# EAGLE board can-weichendecoder-magnet (EAGLE 7.5.0)
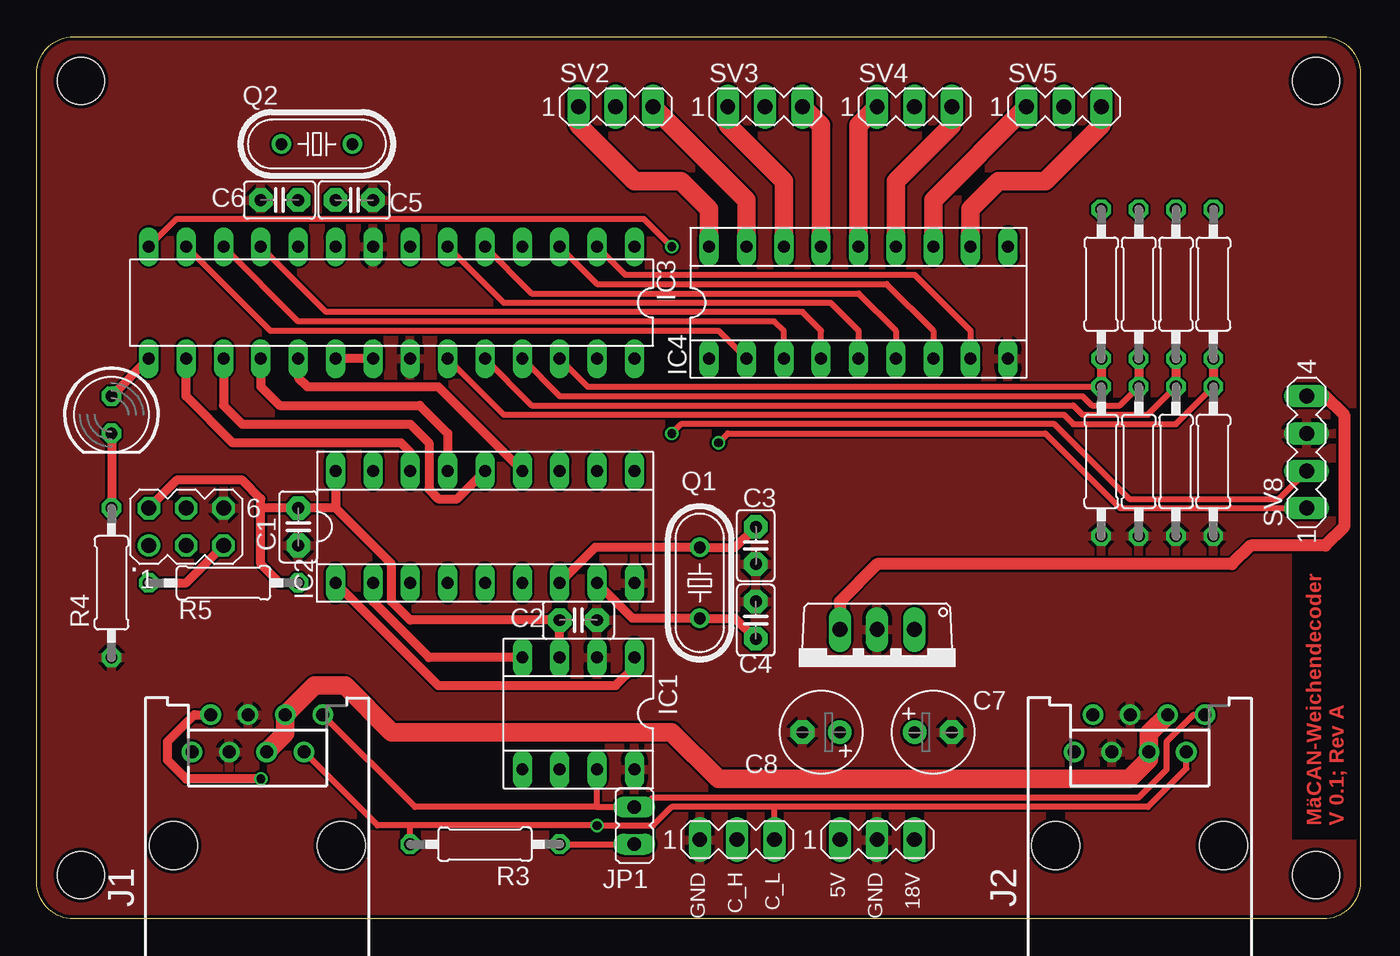
[diagram p0: board, top side]
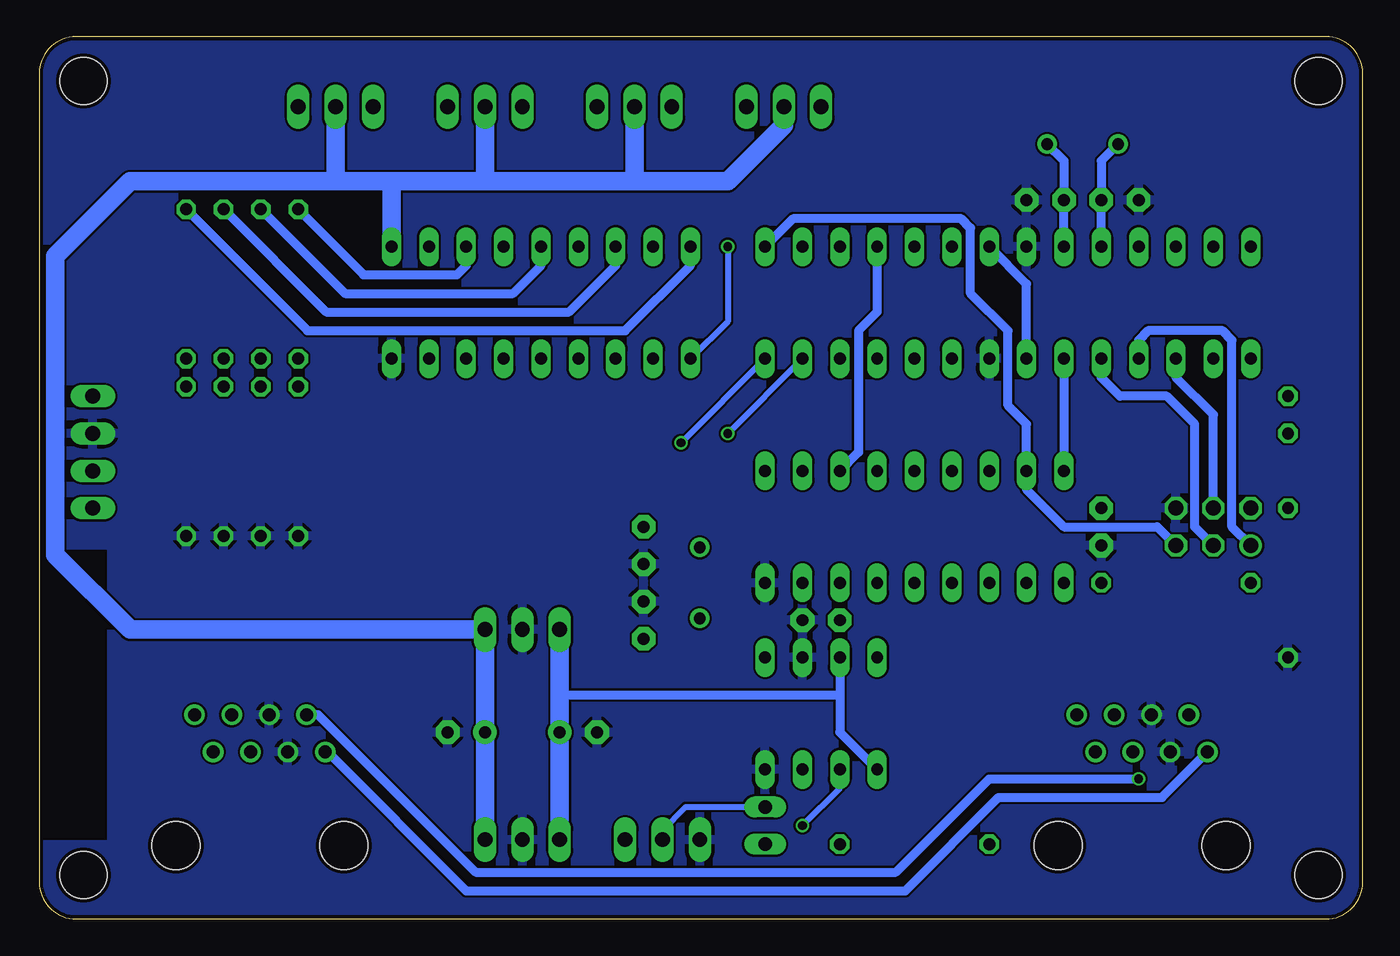
[diagram p1: board, bottom side, seen from below]

Size 90 x 60 mm. Coordinates in mm from the lower left corner, seen from the top.
Outline: 0,57.5 arc-90 2.5,60 87.5,60 arc-90 90,57.5 90,2.5 arc-90 87.5,0 2.5,0 arc-90 0,2.5 0,57.5
Copper layers (1*16): Top 0.035mm / dielectric 1.5mm / Bottom 0.035mm
Design rules "ITEADstudioDRC": minimum track width 6mil, minimum drill 12mil, track to track 6mil, track to pad 6mil, pad to pad 6mil, via to via 6mil, smd to smd 0mil, copper to edge 10mil, drill to drill 10mil, minimum pad ring 10mil, minimum via ring 6mil, stop-mask expansion 2mil, vias tented up to drill 100mil, thermal gap 10mil
Holes 3.2 mm at 3,3 87,3 87,57 3,57

## Footprints (pad centres in the part's own frame; a part is rotated, then mirrored left to right if it is on the bottom)
C2.5-2 = drill 0.813 pad 1.6 octagon: 1 -1.27,0; 2 1.27,0
E2,5-6 = drill 0.813 pad 1.6: + -1.27,0 | drill 0.813 pad 1.6 octagon: - 1.27,0
SOCKET-08 = drill 0.813 long: 1 -3.81,-3.81; 2 -1.27,-3.81; 3 1.27,-3.81; 4 3.81,-3.81; 5 3.81,3.81; 6 1.27,3.81; 7 -1.27,3.81; 8 -3.81,3.81
SOCKET-18 = drill 0.813 long: 1 -10.16,-3.81; 2 -7.62,-3.81; 3 -5.08,-3.81; 4 -2.54,-3.81; 5 0,-3.81; 6 2.54,-3.81; 7 5.08,-3.81; 8 7.62,-3.81; 9 10.16,-3.81; 10 10.16,3.81; 11 7.62,3.81; 12 5.08,3.81; 13 2.54,3.81; 14 0,3.81; 15 -2.54,3.81; 16 -5.08,3.81; 17 -7.62,3.81; 18 -10.16,3.81
DIL28-3 = drill 0.813 long: 1 -16.51,-3.81; 2 -13.97,-3.81; 3 -11.43,-3.81; 4 -8.89,-3.81; 5 -6.35,-3.81; 6 -3.81,-3.81; 7 -1.27,-3.81; 8 1.27,-3.81; 9 3.81,-3.81; 10 6.35,-3.81; 11 8.89,-3.81; 12 11.43,-3.81; 13 13.97,-3.81; 14 16.51,-3.81; 15 16.51,3.81; 16 13.97,3.81; 17 11.43,3.81; 18 8.89,3.81; 19 6.35,3.81; 20 3.81,3.81; 21 1.27,3.81; 22 -1.27,3.81; 23 -3.81,3.81; 24 -6.35,3.81; 25 -8.89,3.81; 26 -11.43,3.81; 27 -13.97,3.81; 28 -16.51,3.81
TO220V = drill 1.016 long: 1 -2.54,-2.54; 2 0,-2.54; 3 2.54,-2.54
215877-7 = drill 0.889: 1 -4.445,6.35; 2 -3.175,8.89; 3 -1.905,6.35; 4 -0.635,8.89; 5 0.635,6.35; 6 1.905,8.89; 7 3.175,6.35; 8 4.445,8.89 | hole 3.251: -5.715,0; 5.715,0
JP1 = drill 0.914 long: 1 0,-1.27; 2 0,1.27
LED5MM = drill 0.813 octagon: A -1.27,0; K 1.27,0
HC49/S = drill 0.813: 1 -2.413,0; 2 2.413,0
0207/10 = drill 0.813 octagon: 1 -5.08,0; 2 5.08,0
MA03-2 = drill 1.016: 1 -2.54,-1.27 | drill 1.016 octagon: 2 -2.54,1.27; 3 0,-1.27; 4 0,1.27; 5 2.54,-1.27; 6 2.54,1.27
MA03-1 = drill 1.016 long: 1 -2.54,0; 2 0,0; 3 2.54,0
MA04-1 = drill 1.016 long: 1 -3.81,0; 2 -1.27,0; 3 1.27,0; 4 3.81,0

## Placement (x,y rotation side)
C1  100n  [C2.5-2]  17.78,26.67 90 top
C2  100n  [C2.5-2]  36.83,20.32 0 top
C3  22p  [C2.5-2]  48.9,25.4 90 top
C4  22p  [C2.5-2]  48.9,20.32 270 top
C5  22p  [C2.5-2]  21.59,48.9 180 top
C6  22p  [C2.5-2]  16.51,48.9 0 top
C7  0,1µ  [E2,5-6]  60.96,12.7 0 top
C8  0,1µ  [E2,5-6]  53.34,12.7 180 top
IC1  MCP 2562  [SOCKET-08]  36.83,13.97 180 top
IC2  MCP 2515  [SOCKET-18]  30.48,26.67 0 top
IC3  ATMEGA 328P  [DIL28-3]  24.13,41.91 180 top
IC4  ULN 2803A  [SOCKET-18]  55.88,41.91 0 top
IC5  7805TV  [TO220V]  57.15,17.14 180 top
J1  [215877-7]  15,5 0 top
J2  [215877-7]  75,5 0 top
JP1  CAN-termination  [JP1]  40.64,6.35 0 top
LED3  [LED5MM]  5.08,34.29 270 top
Q1  16M  [HC49/S]  45.09,22.86 90 top
Q2  16M  [HC49/S]  19.05,52.7 0 top
R3  120  [0207/10]  30.48,5.08 180 top
R4  330  [0207/10]  5.08,22.86 90 top
R5  10K  [0207/10]  12.7,22.86 0 top
R6  10K  [0207/10]  72.39,43.18 270 top
R7  10K  [0207/10]  74.93,43.18 270 top
R8  10K  [0207/10]  77.47,43.18 270 top
R9  10K  [0207/10]  80.01,43.18 270 top
R10  2K  [0207/10]  72.39,31.11 270 top
R11  2K  [0207/10]  74.93,31.11 270 top
R12  2K  [0207/10]  77.47,31.11 270 top
R13  2K  [0207/10]  80.01,31.11 270 top
SV1  ICSP  [MA03-2]  10.16,26.67 0 top
SV2  [MA03-1]  39.37,55.24 0 top
SV3  [MA03-1]  49.53,55.24 0 top
SV4  [MA03-1]  59.69,55.24 0 top
SV5  [MA03-1]  69.85,55.24 0 top
SV6  18V IN  [MA03-1]  57.15,5.4 0 top
SV7  CAN  [MA03-1]  47.62,5.4 0 top
SV8  [MA04-1]  86.36,31.75 90 top

## Library data of the parts
C1-C6 = capacitor-wima
C7 C8 R3-R13 = rcl
IC1-IC4 = ic-package
IC5 = linear
J1 J2 = con-amp
JP1 = jumper
LED3 = led
Q1 Q2 = crystal; OC_FARNELL: 1667008; OC_NEWARK: unknown
SV1-SV8 = con-lstb; OC_FARNELL: unknown; OC_NEWARK: unknown

## Nets
18V: C7.+ IC4.10 IC5.1 SV2.2 SV3.2 SV4.2 SV5.2 SV6.3
CAN-H: IC1.7 J1.8 J2.8 JP1.2 SV7.2
CAN-L: IC1.6 J1.7 J2.7 R3.2 SV7.3
CS: IC2.16 IC3.16
GND: C1.1 C2.2 C3.1 C4.1 C5.1 C6.1 C7.- C8.- IC1.2 IC1.8 IC2.9 IC3.8 IC3.22 IC4.9 IC5.2 J1.3 J1.4 J2.3 J2.4 R4.1 R10.2 R11.2 R12.2 R13.2 SV1.6 SV6.2 SV7.1 SV8.3
INT: IC2.12 IC3.4
MISO: IC2.15 IC3.18 SV1.1
MOSI: IC2.14 IC3.17 SV1.4
N$1: J1.5 J1.6 J2.5 J2.6
N$2: IC1.4 IC2.2
N$3: J1.2 J2.2
N$4: C4.2 IC2.8 Q1.1
N$5: JP1.1 R3.1
N$6: C3.2 IC2.7 Q1.2
N$7: C5.2 IC3.9 Q2.2
N$8: C6.2 IC3.10 Q2.1
N$9: IC1.1 IC2.1
N$10: IC3.2 IC4.8
N$11: IC3.3 IC4.7
N$12: LED3.K R4.2
N$13: IC3.15 LED3.A
N$14: IC3.5 IC4.6
N$15: IC3.6 IC4.5
N$16: IC3.11 IC4.4
N$17: IC3.12 IC4.3
N$18: IC3.13 IC4.2
N$19: IC3.14 IC4.1
N$20: IC4.18 R9.1 SV2.1
N$21: IC4.17 SV2.3
N$22: IC4.16 R8.1 SV3.1
N$23: IC4.15 SV3.3
N$24: IC4.14 R7.1 SV4.1
N$25: IC4.13 SV4.3
N$26: IC4.12 R6.1 SV5.1
N$27: IC4.11 SV5.3
N$28: IC3.26 R6.2 R10.1
N$29: IC3.25 R7.2 R11.1
N$30: IC3.24 R8.2 R12.1
N$31: IC3.23 R9.2 R13.1
N$32: J1.1 J2.1
N$33: IC3.28 SV8.1
N$34: IC3.27 SV8.2
RESET: IC2.17 IC3.1 R5.1 SV1.5
SCK: IC2.13 IC3.19 SV1.3
VCC: C1.2 C2.1 C8.+ IC1.3 IC1.5 IC2.18 IC3.7 IC3.20 IC3.21 IC5.3 R5.2 SV1.2 SV6.1 SV8.4

## Tracks (layer width: path | path; a pad name or v marks a point on that pad's centre or on a via)
18V
  Bottom 1.27: 69.85,50.16 83.82,50.16 88.9,45.09 88.9,24.77 83.82,19.68 IC5.1 C7.+ SV6.3 | 69.85,50.16 66.04,50.16 | 66.04,50.16 59.69,50.16 | 59.69,50.16 49.53,50.16 | 49.53,50.16 43.18,50.16 39.37,53.98 SV2.2 | SV3.2 49.53,50.16 | SV4.2 59.69,50.16 | SV5.2 69.85,50.16 | IC4.10 66.04,50.16
CAN-H
  Top 0.406: 38.1,7.62 IC1.7 | 38.1,7.62 JP1.2 41.27,7.62 41.91,8.26 74.93,8.26 76.83,10.16 76.83,12.06 78.66,13.89 J2.8 | 38.1,7.62 25.71,7.62 J1.8
  Bottom 0.406: SV7.2 47.62,6.03 46.04,7.62 JP1.2
CAN-L  (via drill 0.6)
  Top 0.406: 50.16,7.62 75.56,7.62 78.17,10.23 J2.7 | 50.16,7.62 43.18,7.62 41.91,6.35 v38.1,6.35 25.4,6.35 | SV7.3 50.16,7.62 | 25.4,6.35 23.18,6.35 J1.7 | R3.2 25.4,6.35
  Bottom 0.406: IC1.6 35.56,8.89 v38.1,6.35
CS
  Top 0.61: IC2.16 25.4,31.75 24.77,32.38 13.34,32.38 10.16,35.56 IC3.16
GND
  pour Top: -1.27,-1.27 91.44,-1.27 91.44,5.08 85.09,5.08 85.09,25.4 91.44,25.4 91.44,60.96 -1.27,60.96
  pour Bottom: -1.27,-1.27 91.44,-1.27 91.44,5.08 85.09,5.08 85.09,25.4 91.44,25.4 91.44,60.96 -1.27,60.96
INT
  Bottom 0.61: IC3.4 33.02,41.27 34.29,40.01 34.29,31.75 IC2.12
MISO
  Top 0.61: IC3.18 15.24,36.2 16.51,34.92 26.04,34.92 27.94,33.02 IC2.15
  Bottom 0.61: SV1.1 8.89,26.67 8.89,39.37 9.53,40.01 14.61,40.01 15.24,39.37 IC3.18
MOSI
  Top 0.61: IC3.17 12.7,34.92 13.97,33.66 25.4,33.66 26.67,32.38 26.67,29.21 27.3,28.57 28.57,28.57 IC2.14
  Bottom 0.61: SV1.4 10.16,34.29 12.7,36.83 IC3.17
N$1
  Top 1.27: J1.5 16.91,12.62 J1.6 18.89,15.88 20.95,15.88 24.13,12.7 43.18,12.7 46.35,9.53 74.3,9.53 75.64,10.87 J2.5 75.64,12.62 J2.6
N$2
  Top 0.61: IC1.4 26.67,17.78 22.86,21.59 IC2.2
N$3  (via drill 0.6)
  Top 0.61: v15.24,9.53 10.16,9.53 8.89,10.79 8.89,12.06 10.71,13.89 J1.2
  Bottom 0.61: v15.24,9.53 25.4,9.53 31.75,3.17 60.33,3.17 71.04,13.89 J2.2
N$4
  Top 0.61: IC2.8 40.51,20.45 Q1.1 47.5,20.45 C4.2
N$5
  Top 0.406: R3.1 JP1.1
N$6
  Top 0.61: IC2.7 37.97,25.27 Q1.2 47.5,25.27 C3.2
N$7
  Bottom 0.61: IC3.9 C5.2 20.32,51.56 Q2.2
N$8
  Bottom 0.61: IC3.10 C6.2 17.78,51.56 Q2.1
N$9
  Top 0.61: IC2.1 27.3,15.88 39.37,15.88 40.64,17.14 IC1.1
N$10
  Top 0.406: IC3.2 40.01,43.81 59.69,43.81 63.5,40.01 IC4.8
N$11
  Top 0.406: IC3.3 38.1,43.18 57.78,43.18 60.96,40.01 IC4.7
N$12
  Top 0.61: LED3.K R4.2
N$13
  Top 0.61: IC3.15 LED3.A
N$14
  Top 0.406: IC3.5 33.66,42.55 55.88,42.55 58.42,40.01 IC4.6
N$15
  Top 0.406: IC3.6 31.75,41.91 53.98,41.91 55.88,40.01 IC4.5
N$16
  Top 0.406: IC4.4 53.34,40.01 52.07,41.27 19.68,41.27 IC3.11
N$17
  Top 0.406: IC4.3 50.8,40.01 50.16,40.64 17.78,40.64 IC3.12
N$18
  Top 0.406: IC3.13 15.88,40.01 46.35,40.01 IC4.2
N$19  (via drill 0.6)
  Top 0.406: IC3.14 9.53,47.62 41.27,47.62 v43.18,45.72
  Bottom 0.406: v43.18,45.72 43.18,40.64 IC4.1
N$20
  Top 1.27: IC4.18 45.72,48.26 43.81,50.16 40.64,50.16 36.83,53.98 SV2.1
  Bottom 0.61: R9.1 71.75,40.01 50.16,40.01 45.72,44.45 IC4.18
N$21
  Top 1.27: IC4.17 48.26,48.9 SV2.3
N$22
  Top 1.27: IC4.16 50.8,50.16 46.99,53.98 SV3.1
  Bottom 0.61: R8.1 70.48,41.27 53.98,41.27 50.8,44.45 IC4.16
N$23
  Top 1.27: IC4.15 53.34,53.98 SV3.3
N$24
  Top 1.27: IC4.14 55.88,53.98 SV4.1
  Bottom 0.61: R7.1 69.22,42.55 57.78,42.55 55.88,44.45 IC4.14
N$25
  Top 1.27: IC4.13 58.42,50.16 62.23,53.98 SV4.3
N$26
  Top 1.27: IC4.12 60.96,48.9 SV5.1
  Bottom 0.61: R6.1 67.94,43.81 61.59,43.81 60.96,44.45 IC4.12
N$27
  Top 1.27: IC4.11 63.5,48.26 65.41,50.16 68.58,50.16 72.39,53.98 SV5.3
N$28
  Top 0.406: R10.1 37.47,36.2 IC3.26
  Top 0.61: R6.2 R10.1
N$29
  Top 0.406: R11.1 73.66,34.92 71.75,34.92 71.12,35.56 35.56,35.56 IC3.25
  Top 0.61: R7.2 R11.1
N$30
  Top 0.406: IC3.24 33.66,34.92 70.48,34.92 71.12,34.29 75.56,34.29 R12.1
  Top 0.61: R8.2 R12.1
N$31
  Top 0.406: IC3.23 31.75,34.29 69.85,34.29 70.48,33.66 77.47,33.66 R13.1
  Top 0.61: R9.2 R13.1
N$32
  Bottom 0.61: J1.1 13.65,8.26 24.77,8.26 31.11,1.91 60.96,1.91 70.41,11.35 J2.1
N$33  (via drill 0.6)
  Top 0.406: v46.35,32.38 46.99,33.02 68.58,33.02 73.66,27.94 SV8.1
  Bottom 0.406: IC3.28 v46.35,32.38
N$34  (via drill 0.6)
  Top 0.406: v43.18,33.02 43.81,33.66 69.22,33.66 74.3,28.57 84.45,28.57 SV8.2
  Bottom 0.406: v43.18,33.02 IC3.27
RESET
  Top 0.61: R5.1 10.16,22.86 SV1.5
  Bottom 0.61: SV1.5 13.97,26.67 20.32,26.67 22.86,29.21 IC2.17 22.86,33.66 24.13,34.92 24.13,40.01 26.67,42.55 26.67,46.99 27.3,47.62 38.73,47.62 IC3.1
SCK
  Top 0.61: IC3.19 17.78,36.83 18.41,36.2 27.3,36.2 IC2.13
  Bottom 0.61: SV1.3 11.43,26.67 11.43,33.66 13.34,35.56 16.51,35.56 17.78,36.83 IC3.19
VCC
  Top 0.61: IC1.3 C2.1 25.4,20.32 24.13,21.59 24.13,24.13 20.32,27.94 | 20.32,27.94 C1.2 15.24,27.94 | IC2.18 20.32,27.94 | IC3.20 IC3.21 22.86,37.47 | R5.2 16.51,22.86 15.24,24.13 15.24,27.94 | 15.24,27.94 15.24,28.57 13.97,29.84 9.53,29.84 SV1.2
  Top 0.813: SV8.4 87.63,35.56 88.9,34.29 88.9,26.67 87.63,25.4 82.55,25.4 81.28,24.13 57.15,24.13 54.61,21.59 IC5.3
  Bottom 0.61: IC1.3 35.56,15.24 | 35.56,15.24 35.56,12.7 IC1.5 | IC3.20 IC2.18 | IC3.21 22.86,43.18 IC3.7 | 54.61,15.24 35.56,15.24
  Bottom 1.27: IC5.3 54.61,15.24 C8.+ SV6.1

## Text on the board
Top: MäCAN-Weichendecoder / V 0.1; Rev A
tPlace: . | GND | 18V
tNames: GND | C_H | C_L | 5V